# Altium PCB PCBPIC80_A3977.PcbDoc
Units mm, origin at the board's own origin, x right, y up, seen from the top; angles counter-clockwise.
Board outline 152.4 x 101.6 mm, 2 copper layers (Top Layer, Bottom Layer); 108 components, 109 nets, 496 pads, 175 vias.
Unrouted connection lines stored in the file: 83.
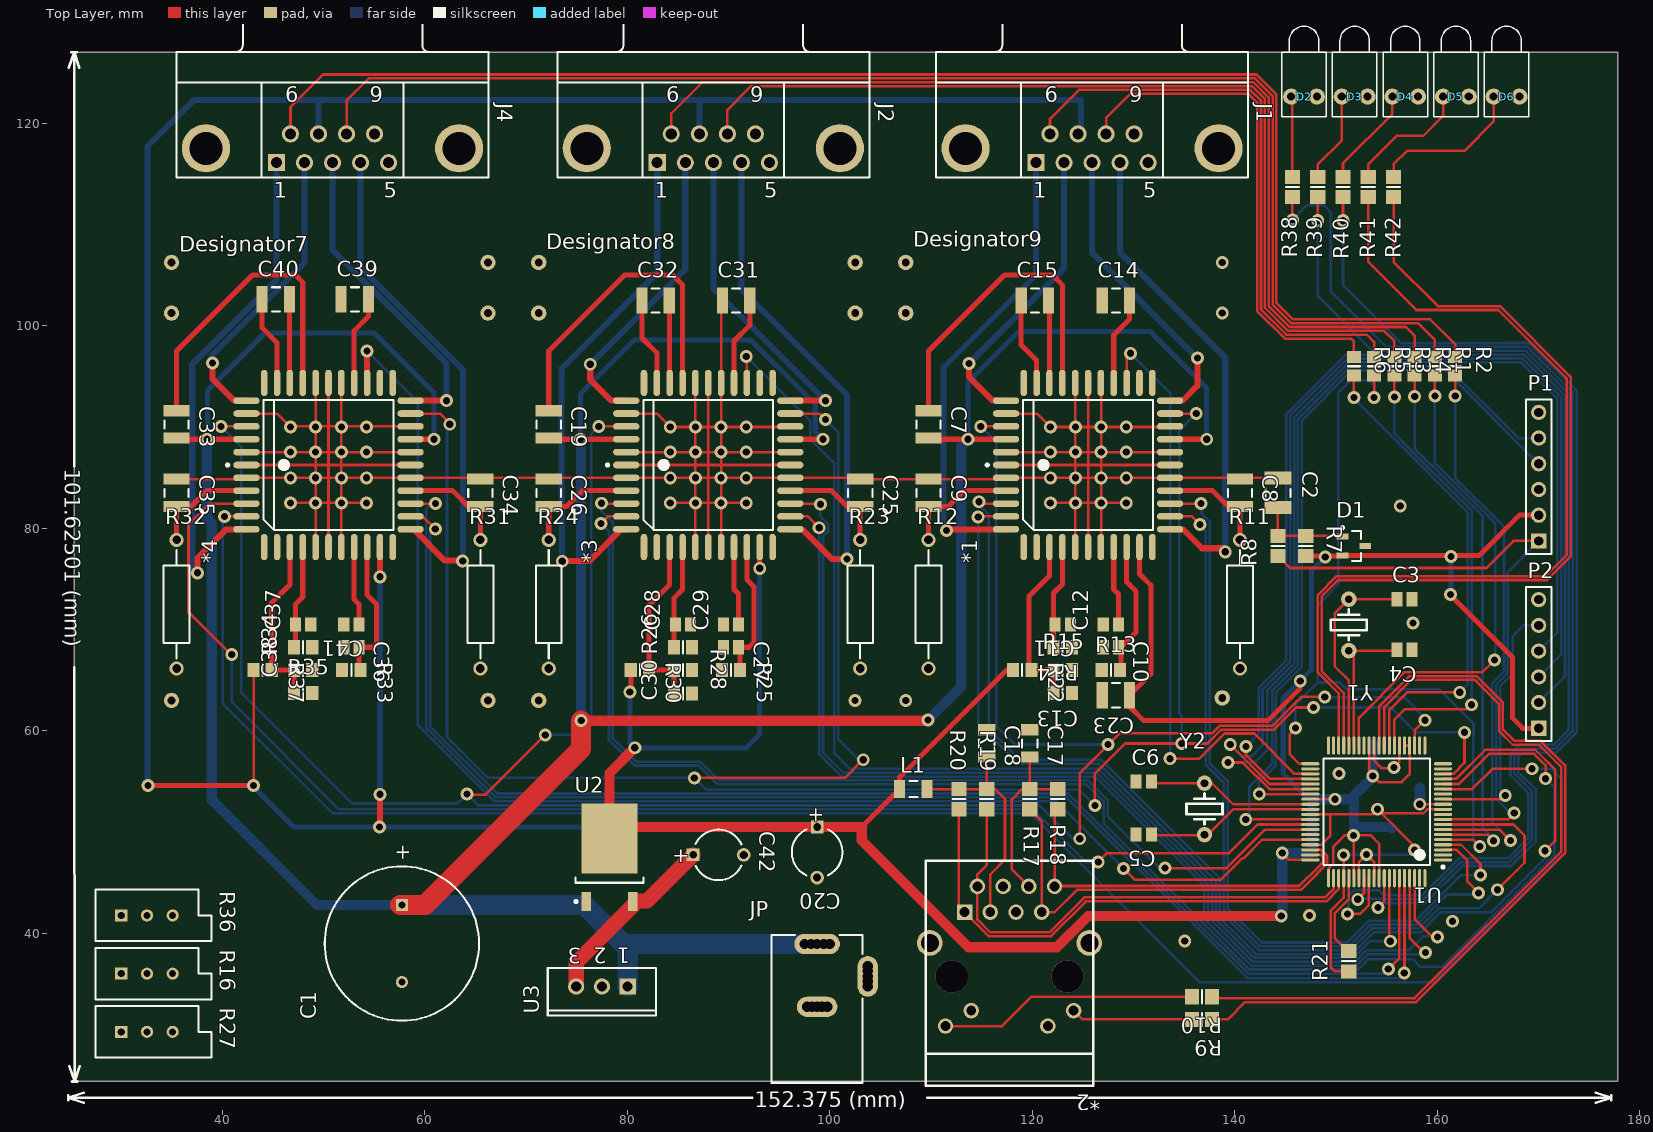
[diagram p0: Top Layer view]
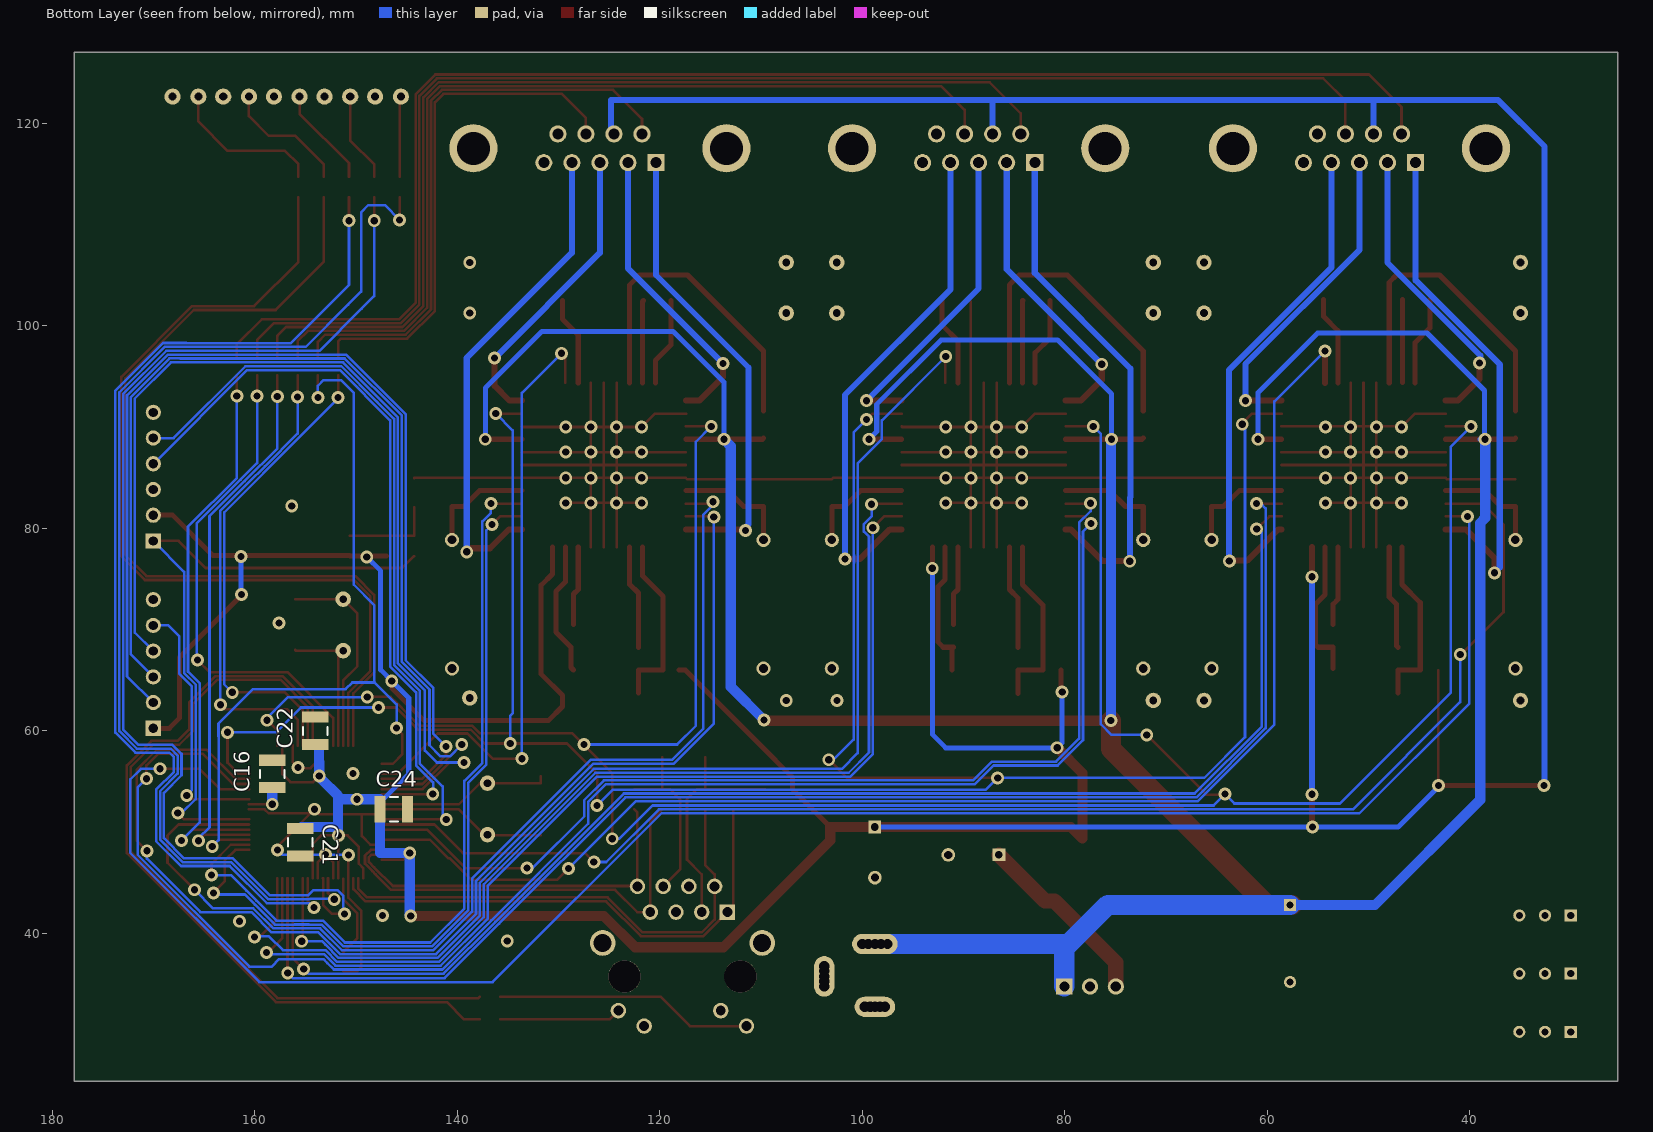
[diagram p1: Bottom Layer view, seen from below]

## Layer stack, top to bottom
Top Layer: signal copper 0.0356
Dielectric: dielectric 0.32, FR-4, Dk 4.8
Bottom Layer: signal copper 0.0356

## Board outline
25.4,25.4 177.8,25.4 177.8,127 25.4,127

## Design rules (kind name [scope] priority, off if disabled: settings)
Clearance [All] p1: gap=0.127
PolygonConnect [All] p1: connectstyle=Relief reliefconductorwidth=0.254 reliefentries=4 polygonreliefangle="90 Angle"
RoomDefinition Sheet1 [InComponentClass('Sheet1')] p1: confinementstyle=ConfineOut formatcopy=TRUE lockcomponents=FALSE outline 178.959,24.276 192.234,24.276 192.234,42.802 178.959,42.802
RoutingVias [All] p1: holewidth=0.711 width=1.27 viastyle="Through Hole" minholewidth=0.711 minwidth=1.27 maxholewidth=0.711 maxwidth=1.27
SilkscreenOverComponentPads [All] p1: minsilkscreentomaskgap=0.254
SolderMaskExpansion [All] p1: expansion=0.102
Width [All] p1: maxlimit=2.54 minlimit=0.254 preferedwidth=0.254
27 further rules are at their usual default settings.

## Components (designator, comment, footprint, x,y, rotation, side; value= is the part's Value field where it differs from the comment)
*1 "Component_1" PLCC-44AM 125.5,86.25 r90 top
*2 "LU1T516-43" EthernetCON 117.75,35.75 r270 top
*3 "Component_1" PLCC-44AM 88,86.25 r90 top
*4 "Component_1" PLCC-44AM 50.5,86.25 r90 top
C1 "Cap Pol1" RB7.6-15 57.75,39 r90 top
C2 "Cap" CAPC3225N 144.25,83.5 r270 top
C3 "Cap" CAPC2012L 156.75,73 r0 top
C4 "Cap" CAPC2012L 156.75,68 r180 top
C5 "Cap" CAPC2012L 131,49.75 r180 top
C6 "Cap" CAPC2012L 131,55 r0 top
C7 "Cap" RESC3225L 109.75,90.25 r270 top
C8 "Cap" RESC3225L 140.5,83.5 r270 top
C9 "Cap" RESC3225L 109.75,83.5 r270 top
C10 "Cap" CAPC2012L 127.75,68.25 r0 top
C11 "Cap" CAPC2012L 123,70.5 r180 top
C12 "Cap" CAPC2012L 127.75,70.5 r180 top
C13 "Cap" RESC2012N 123,63.75 r180 top
C14 "Cap" RESC3225L 128.25,102.5 r0 top
C15 "Cap" RESC3225L 120.25,102.5 r0 top
C16 "Cap" CAPC3225L 158.25,55.75 r90 bottom
C17 "Cap" CAPC3216L 119.75,58.75 r270 top
C18 "Cap" CAPC3216L 115.5,58.75 r270 top
C19 "Cap" RESC3225L 72.25,90.25 r270 top
C20 "Cap Pol1" CAPPR5-5x5 98.75,48 r270 top
C21 "Cap" CAPC3225L 155.5,49 r270 bottom
C22 "Cap" CAPC3225L 154,60 r90 bottom
C23 "Cap" CAPC3225L 128.25,63.5 r180 top
C24 "Cap" CAPC3225L 146.25,52.25 r180 bottom
C25 "Cap" RESC3225L 103,83.5 r270 top
C26 "Cap" RESC3225L 72.25,83.5 r270 top
C27 "Cap" CAPC2012L 90.25,68.25 r0 top
C28 "Cap" CAPC2012L 85.5,70.5 r180 top
C29 "Cap" CAPC2012L 90.25,70.5 r180 top
C30 "Cap" RESC2012N 85.5,63.7 r180 top
C31 "Cap" RESC3225L 90.75,102.5 r0 top
C32 "Cap" RESC3225L 82.8,102.5 r0 top
C33 "Cap" RESC3225L 35.5,90.25 r270 top
C34 "Cap" RESC3225L 65.5,83.5 r270 top
C35 "Cap" RESC3225L 35.5,83.5 r270 top
C36 "Cap" CAPC2012L 52.75,68.25 r0 top
C37 "Cap" CAPC2012L 48,70.5 r180 top
C38 "Cap" RESC2012N 48,66 r180 top
C39 "Cap" RESC3225L 53.1,102.6 r0 top
C40 "Cap" RESC3225L 45.3,102.6 r0 top
C41 "Cap" CAPC2012L 52.75,70.5 r180 top
C42 "Cap Pol1" CAPPR5-5x5 89,47.75 r0 top
D1 "Diode" SOT95P240-3N 151.75,78.25 r0 top
D2 "Power" LED-1 146.825,122.625 r90 top
D3 "Run" LED-1 151.825,122.625 r90 top
D4 "Alfa" LED-1 156.825,122.625 r90 top
D5 "Delta" LED-1 161.825,122.625 r90 top
D6 "Focus" LED-1 166.825,122.625 r90 top
Designator7 "Comment" PCBComponent_1 35.5,106 r0 top
Designator8 "Comment" PCBComponent_1 71.75,106.25 r0 top
Designator9 "Comment" PCBComponent_1 108,106.5 r0 top
J1 "D Connector 9" D-SUB-9 125.9,116.1 r0 top
J2 "D Connector 9" D-SUB-9 88.5,116.1 r0 top
J4 "D Connector 9" D-SUB-9 50.9,116.1 r0 top
JP "PWR2.5" KLD-0202 98.75,25.25 r90 top
L1 "Inductor" INDC3216AL 108.25,54.25 r0 top
P1 "Программатор" HDR1X6 170,78.75 r90 top
P2 "SPI" HDR1X6 170,60.25 r90 top
R1 "Res2" RESC2012N 159.75,96 r270 top
R2 "Res2" RESC2012N 161.75,96 r270 top
R3 "Res2" RESC2012N 155.75,96 r270 top
R4 "Res2" RESC2012N 157.75,96 r270 top
R5 "Res2" RESC2012N 153.75,96 r270 top
R6 "Res2" RESC2012N 151.75,96 r270 top
R7 "Res2" RESC2012M 147,78.25 r270 top
R8 "Res2" RESC2012M 144.25,78.25 r90 top
R9 "Res2" RESC2012M 136.75,31.5 r180 top
R10 "Res2" RESC2012M 136.75,33.75 r180 top
R11 "Res2" AXIAL-0.5 140.5,72.5 r90 top
R12 "Res2" AXIAL-0.5 109.75,72.5 r90 top
R13 "Res2" RESC2012N 127.75,66 r0 top
R14 "Res2" RESC2012N 123,68.25 r180 top
R15 "Res2" RESC2012N 123,66 r0 top
R16 "RPot" VR5 32.575,36.025 r0 top
R17 "Res2" RESC2012M 119.75,53.25 r270 top
R18 "Res2" RESC2012M 122.5,53.25 r270 top
R19 "Res2" RESC2012M 115.5,53.25 r270 top
R20 "Res2" RESC2012M 112.75,53.25 r270 top
R21 "Res2" RESC2012M 151.25,37.25 r90 top
R22 "Res2" RESC2012N 119,66 r0 top
R23 "Res2" AXIAL-0.5 103,72.5 r90 top
R24 "Res2" AXIAL-0.5 72.25,72.5 r90 top
R25 "Res2" RESC2012N 90.25,66 r0 top
R26 "Res2" RESC2012N 85.5,68.25 r180 top
R27 "RPot" VR5 32.575,30.275 r0 top
R28 "Res2" RESC2012N 85.5,66 r0 top
R30 "Res2" RESC2012N 81.25,66 r0 top
R31 "Res2" AXIAL-0.5 65.5,72.5 r90 top
R32 "Res2" AXIAL-0.5 35.5,72.5 r90 top
R33 "Res2" RESC2012N 52.75,66 r0 top
R34 "Res2" RESC2012N 48,68.25 r180 top
R35 "Res2" RESC2012N 48,63.75 r0 top
R36 "RPot" VR5 32.575,41.775 r0 top
R37 "Res2" RESC2012N 44,66 r0 top
R38 "Res2" RESC2012M 145.675,113.7 r90 top
R39 "Res2" RESC2012M 148.175,113.7 r90 top
R40 "Res2" RESC2012M 150.675,113.7 r90 top
R41 "Res2" RESC2012M 153.175,113.7 r90 top
R42 "Res2" RESC2012M 155.675,113.7 r90 top
U1 "PIC18F87J60-I/PT" TQFP-PT80_N 154,52 r180 top
U2 "LM1117DT-3.3" TD03B_N 78.25,47.5 r90 top
U3 "µA78M05CKC" KC03 77.5,34.75 r180 top
Y1 "XTAL" Quartz 151.25,73 r270 top
Y2 "XTAL" Quartz 137,49.75 r90 top

## Footprints (in the part's own frame and the unit in brackets; to place one, negate y for a bottom-side part, rotate by r counter-clockwise, add the part's x,y. Pads: shape width x height; smd on the part's side, far side on the other; paste and mask are expansions set on the pad)
AXIAL-0.5 [mm] "Axial Device, Thru-Hole; 2 Leads; 0.5 in Pin Spacing"
  round 1.4 hole 0.85: 1(-6.35,0) 2(6.35,0)
  silkscreen extent -5.33,-1.27 5.33,1.27
CAPC2012L [mm] "Chip Capacitor, Body 2.0x1.3mm, IPC High Density"
  rect 1.1x1.4 smd: 1(-0.75,0) 2(0.75,0)
  body extent -1.1,-0.72 1.1,0.72, height 1.4
CAPC3216L [mm] "Chip Capacitor, Body 3.2x1.6mm, IPC High Density"
  rect 1.1x1.7 smd: 1(-1.35,0) 2(1.35,0)
  silkscreen extent -0.4,-0.75 0.4,0.75, body extent -1.7,-0.9 1.7,0.9, height 1.3
CAPC3225L [mm] "Chip Capacitor, Body 3.2x2.5mm, IPC High Density"
  rect 1.1x2.6 smd: 1(-1.35,0) 2(1.35,0)
  silkscreen extent -0.4,-1.2 0.4,1.2, body extent -1.7,-1.35 1.7,1.35, height 1.5
CAPC3225N [mm] "Chip Capacitor, Body 3.2x2.5mm, IPC Medium Density"
  rect 1.3x2.7 smd: 1(-1.45,0) 2(1.45,0)
  silkscreen extent -0.4,-1.25 0.4,1.25, body extent -1.7,-1.35 1.7,1.35, height 1.5
CAPPR5-5x5 [mm] "Capacitor, Electrolytic, Radial; Body 5 x 5 mm (Dia.xH typ); Pin Spacing 5 mm (typ)"
  rect 1.25x1.25 hole 0.75: 1(-2.5,0)
  round 1.35 hole 0.8: 2(2.5,0)
  silkscreen extent -2.26,-2.5 2.27,2.5
D-SUB-9 [mm] "Connector"
  rect 1.69x1.69 hole 1.09: 1(-5.54,0)
  round 1.69 hole 1.09: 2(-2.77,0) 3(0,0) 4(2.77,0) 5(5.54,0) 6(-4.155,2.84) 7(-1.385,2.84) 8(1.385,2.84) 9(4.155,2.84)
  round 4.76 hole 3.26: 10(-12.495,1.42) 11(12.495,1.42)
  silkscreen extent -15.4,-1.48 15.4,16.92, body extent -15.49,-1.52 15.49,17.02, height 6.35
EthernetCON [mil] "Ethernet connector w/two LEDs"
  rect 60x60 hole 38: 1(-250,-175)
  round 60 hole 38: 2(-350,-125) 3(-250,-75) 4(-350,-25) 5(-250,25) 6(-350,75) 7(-250,125) 8(-350,175) 9(193,-249) 10(133,-149) 11(193,149) 12(133,249)
  round 100 hole 70: 13(-130,-310) 14(-130,310)
  round 125 hole 125 unplated: 15(0,-225) 16(0,225)
  silkscreen extent -450,-325 425,325, body extent -450,-325 425,325, height 550
HDR1X6 [mm] "Connector; Header; 6 Position"
  rect 1.5x1.5 hole 0.9: 1(0,0)
  round 1.5 hole 0.9: 2(2.54,0) 3(5.08,0) 4(7.62,0) 5(10.16,0) 6(12.7,0)
  silkscreen extent -1.27,-1.27 13.97,1.27
INDC3216AL [mm] "Chip Inductor, Body 3.2x1.6mm, IPC High Density"
  rect 1.1x1.8 smd: 1(-1.35,0) 2(1.35,0)
  silkscreen extent -0.4,-0.8 0.4,0.8, body extent -1.7,-0.9 1.7,0.9, height 0.55
KC03 [mm] "TO, Thru-Hole, Vertical, Heatsink Mounted; 3 In-Line Leads; Pitch 2.54 mm"
  rect 1.6x1.6 hole 1: 1(-2.54,0)
  round 1.6 hole 1: 2(0,0) 3(2.54,0)
  silkscreen extent -5.35,-1.85 5.35,2.85
KLD-0202 [mm] "DC Power Jack, 2.5mm, KLD Series, PCB Mount"
  oval 2x4.5 hole 1: 1(13.7,0)
  round 1.5 hole 1: 1A(13.7,-1.25) 1B(13.7,1.25) 2A(7.5,-1) 2B(7.5,1) 3A(9.5,-5) 3B(11.5,-5)
  oval 2x4 hole 1: 2(7.5,0)
  oval 4x2 hole 1: 3(10.5,-5)
  silkscreen extent 0,-4.5 14.6,4.5
LED-1 [mm] "Typical RED GaAs LED; 2 Leads"
  round 1.6 hole 0.8: 1(0,1.27) 2(0,-1.27)
  silkscreen extent -2,-2.2 6.95,2.2
PCBComponent_1 [mm]
  body extent 0,-43.18 30.48,0, height 25
PLCC-44AM [mm] "Leaded Chip Carrier, 44-Leads, Body 16.6x16.6mm, Pitch 1.27mm, IPC Low Density"
  oval 0.65x2.6 smd: 1(0,8.1) 2(-1.27,8.1) 3(-2.54,8.1) 4(-3.81,8.1) 5(-5.08,8.1) 6(-6.35,8.1) 18(-6.35,-8.1) 19(-5.08,-8.1) 20(-3.81,-8.1) 21(-2.54,-8.1) 22(-1.27,-8.1) 23(0,-8.1) 24(1.27,-8.1) 25(2.54,-8.1) 26(3.81,-8.1) 27(5.08,-8.1) 28(6.35,-8.1) 40(6.35,8.1) 41(5.08,8.1) 42(3.81,8.1) 43(2.54,8.1) 44(1.27,8.1)
  oval 2.6x0.65 smd: 7(-8.1,6.35) 8(-8.1,5.08) 9(-8.1,3.81) 10(-8.1,2.54) 11(-8.1,1.27) 12(-8.1,0) 13(-8.1,-1.27) 14(-8.1,-2.54) 15(-8.1,-3.81) 16(-8.1,-5.08) 17(-8.1,-6.35) 29(8.1,-6.35) 30(8.1,-5.08) 31(8.1,-3.81) 32(8.1,-2.54) 33(8.1,-1.27) 34(8.1,0) 35(8.1,1.27) 36(8.1,2.54) 37(8.1,3.81) 38(8.1,5.08) 39(8.1,6.35)
  silkscreen extent -6.4,-6.4 6.4,10.07, body extent -8.33,-8.33 8.33,8.33, height 4.57
Quartz [mil]
  round 60 hole 30: 1(0,0) 2(200,0)
  silkscreen extent 40,-70 160,70, body extent -100,-100 300,100, height 90
RB7.6-15 [mm] "Polarized Capacitor (Radial); 2 Leads"
  rect 1.2x1.2 hole 0.7: 1(3.81,0)
  round 1.2 hole 0.7: 2(-3.81,0)
  silkscreen extent -7.62,-7.62 7.62,7.62
RESC2012M [mm] "Chip Resistor, Body 2.0x1.2mm, IPC Low Density"
  rect 1.4x1.5 smd: 1(-1,0) 2(1,0)
  silkscreen extent 0,-0.65 0,0.65, body extent -1.07,-0.7 1.07,0.7, height 0.7
RESC2012N [mm] "Chip Resistor, Body 2.0x1.2mm, IPC Medium Density"
  rect 1.2x1.4 smd: 1(-0.9,0) 2(0.9,0)
  silkscreen extent 0,-0.6 0,0.6, body extent -1.07,-0.7 1.07,0.7, height 0.7
RESC3225L [mm] "Chip Resistor, Body 3.2x2.5mm, IPC High Density"
  rect 1.1x2.6 smd: 1(-1.35,0) 2(1.35,0)
  silkscreen extent -0.4,-1.2 0.4,1.2, body extent -1.68,-1.32 1.68,1.32, height 0.9
SOT95P240-3N [mm] "SOT23, 3-Leads, Body 2.9x1.3mm, Pitch 0.95mm, Lead Span 2.4mm, IPC Medium Density"
  rect 1.15x0.6 smd: 1(-1.125,0.95) 2(-1.125,-0.95) 3(1.125,0)
  silkscreen extent -1.25,-1.5 0.7,1.92, body extent -0.7,-1.5 0.7,1.5, height 1.14
TD03B_N [mm] "D-PAK, 4-Leads, Body 6.1x6.6mm, Pitch 2.29mm, Lead Span 9.7mm, IPC Medium Density"
  rect 1.9x0.95 smd: 1(-4.35,2.28) 3(-4.35,-2.28)
  rect 6.9x5.5 smd: 4(1.85,0)
  silkscreen extent -4.47,-3.35 -2,3.43, body extent -2.5,-3.35 3.7,3.35, height 2.38
TQFP-PT80_N [mm] "Thin QFP, 80-Leads, Body 12x12mm, Pitch 0.5mm, IPC Medium Density"
  oval 1.8x0.3 smd: 1(-6.55,4.75) 2(-6.55,4.25) 3(-6.55,3.75) 4(-6.55,3.25) 5(-6.55,2.75) 6(-6.55,2.25) 7(-6.55,1.75) 8(-6.55,1.25) 9(-6.55,0.75) 10(-6.55,0.25) 11(-6.55,-0.25) 12(-6.55,-0.75) 13(-6.55,-1.25) 14(-6.55,-1.75) 15(-6.55,-2.25) 16(-6.55,-2.75) 17(-6.55,-3.25) 18(-6.55,-3.75) 19(-6.55,-4.25) 20(-6.55,-4.75) 41(6.55,-4.75) 42(6.55,-4.25) 43(6.55,-3.75) 44(6.55,-3.25) 45(6.55,-2.75) 46(6.55,-2.25) 47(6.55,-1.75) 48(6.55,-1.25) 49(6.55,-0.75) 50(6.55,-0.25) 51(6.55,0.25) 52(6.55,0.75) 53(6.55,1.25) 54(6.55,1.75) 55(6.55,2.25) 56(6.55,2.75) 57(6.55,3.25) 58(6.55,3.75) 59(6.55,4.25) 60(6.55,4.75)
  oval 0.3x1.8 smd: 21(-4.75,-6.55) 22(-4.25,-6.55) 23(-3.75,-6.55) 24(-3.25,-6.55) 25(-2.75,-6.55) 26(-2.25,-6.55) 27(-1.75,-6.55) 28(-1.25,-6.55) 29(-0.75,-6.55) 30(-0.25,-6.55) 31(0.25,-6.55) 32(0.75,-6.55) 33(1.25,-6.55) 34(1.75,-6.55) 35(2.25,-6.55) 36(2.75,-6.55) 37(3.25,-6.55) 38(3.75,-6.55) 39(4.25,-6.55) 40(4.75,-6.55) 61(4.75,6.55) 62(4.25,6.55) 63(3.75,6.55) 64(3.25,6.55) 65(2.75,6.55) 66(2.25,6.55) 67(1.75,6.55) 68(1.25,6.55) 69(0.75,6.55) 70(0.25,6.55) 71(-0.25,6.55) 72(-0.75,6.55) 73(-1.25,6.55) 74(-1.75,6.55) 75(-2.25,6.55) 76(-2.75,6.55) 77(-3.25,6.55) 78(-3.75,6.55) 79(-4.25,6.55) 80(-4.75,6.55)
  silkscreen extent -6.68,-5.25 5.25,5.57, body extent -6,-6 6,6, height 1.2
VR5 [mm] "Variable Resistor, Thru-Hole; 3 Leads"
  rect 1.2x1.2 hole 0.7: 1(-2.54,0)
  round 1.2 hole 0.7: 2(0,0) 3(2.54,0)
  silkscreen extent -5.08,-2.54 6.35,2.54

## Part data
C1 C20 C42: "Polarized Capacitor (Radial)"
C2 C3 C4 C5 C6 C7 C8 C9 C10 C11 C12 C13 C14 C15 C16 C17 C18 C19 C21 C22 C23 C24 C25 C26 C27 C28 C29 C30 C31 C32 C33 C34 C35 C36 C37 C38 C39 C40 C41: "Capacitor"
D1: "Default Diode"
D2 D3 D4 D5 D6: library part LED1, "Typical RED GaAs LED"
J1 J2 J4: "Receptacle Assembly, 9 Position, Right Angle"
JP: "Low Voltage Power Supply Connector"
P1 P2: library part "Header 6", "Header, 6-Pin"
R1 R2 R3 R4 R5 R6 R7 R8 R9 R10 R11 R12 R13 R14 R15 R17 R18 R19 R20 R21 R22 R23 R24 R25 R26 R28 R30 R31 R32 R33 R34 R35 R37 R38 R39 R40 R41 R42: "Resistor"
R16 R27 R36: "Potentiometer"
U1: "High Performance, 1-Mbit Flash Microcontroller with Ethernet, 128K Flash, 80-Pin TQFP, Industrial Temperature Range"
U2: "800mA Low-Dropout Linear Regulator"
U3: "Positive-Voltage Regulator"
Y1 Y2: "Crystal Oscillator"

## Free pads (board coordinates)
  round 1.524 hole 1: 0(98.15,38.95) 0(98.225,32.75) 0(99.2,32.75) 0(99.4,38.95) 0(103.75,35.275) 0(103.75,36.275)
  round 1.524 hole 0.762: 1(66.25,106.25) 2(71.25,106.25) 3(71.25,101.25) 4(66.25,101.25) 5(35,106.25) 6(35,101.25) 7(102.5,106.25) 8(102.5,101.25) 9(107.5,106.25) 10(107.5,101.25) 11(138.75,63.25) 12(71.25,63) 13(66.25,63) 14(35,63)

## Via types
v1: diameter 1.27, hole 0.711, Top Layer to Bottom Layer, 175 vias

## Nets (pads, with @x,y where several pads share a name; then routed paths per layer and width w, separated by ;. In a path a pad name is that pad's centre, name@x,y a point inside that pad or via, vN(x,y) a via of type N, cw(c..) or ccw(c..) an arc to the next point about the centre after c; other vN are vias at no path point)
+5: C42.1 U2.3 U3.3 | length 18.3
  Top Layer w1.5: U3.3 74.96,37.135 81.025,43.2 81.95,43.2 C42.1
+30: *1.25 *1.43 *3.25 *3.43 *4.25 *4.43 C1.1 C7.2 C19.2 C33.2 JP.1 JP.1A JP.1B pad.0@98.15,38.95 pad.0@99.4,38.95 U3.1 | length 366.2
  Top Layer w0.5: C33.2 35.61,88.79 v1(38.5,88.79) *4.43 ; *4.25 v1(60.915,88.79) ; C19.2 72.36,88.79 v1(75.375,88.79) *3.43 ; *3.25 v1(99.325,88.79) ; C7.2 109.86,88.79 v1(113.65,88.79) *1.43 ; *1.25 v1(137.215,88.79)
  Top Layer w1: v1@75.425,61 109.625,61 v1(109.7,61.075)
  Top Layer w2: C1.1@57.59,42.81 60.035,42.81 75.425,58.2 v1@75.425,61
  Bottom Layer w0.5: v1@38.975,88.79 38.737,89.028 38.55,89.215 38.55,93.6 44.225,99.275 55.025,99.275 60.915,93.385 v1(60.915,88.79) ; v1(75.375,88.79) 75.375,93.275 80.7,98.6 92.2,98.6 98.563,92.237 98.563,89.552 v1(99.325,88.79) ; v1(113.65,88.79) 113.65,94.425 118.675,99.45 131.625,99.45 137.215,93.86 v1(137.215,88.79)
  Bottom Layer w1: v1@38.475,88.79 38.475,81.025 38.975,80.525 38.975,53.2 49.365,42.81 C1.1 ; v1(75.45,61.025) v1@75.45,88.79 ; v1(109.7,61.075) 112.975,64.35 112.975,88.115 v1(113.65,88.79)
  Bottom Layer w2: C1.1 75.74,42.81 80.04,38.51 ; U3.1 80.04,38.95 JP.1B
DIRALFA: *1.5 U1.17 | length 116.8
  Top Layer w0.254: v1(114.65,81.125) 114.695,81.17 *1.5 ; U1.17 161.85,55.25 164.731,58.131 169.658,58.131 171.65,56.139 171.65,54.625 171.65,49.175 v1(170.625,48.15)
  Bottom Layer w0.254: v1(114.65,81.125) 114.65,60.711 118.592,56.769 126.521,56.769 138.132,45.158 138.132,41.912 142.088,37.956 151.548,37.956 153.698,40.107 154.975,40.107 154.982,40.114 155.718,40.114 155.725,40.107 158.307,40.107 160.289,42.089 165.336,42.089 170.625,47.378 v1(170.625,48.15) v1@170.525,48.25
DIRDELTA: *3.5 U1.16 | length 154.8
  Top Layer w0.254: v1(77.4,80.475) 78.095,81.17 *3.5 ; U1.16 162.15,54.75 165.15,57.75 169.5,57.75 170.675,56.575 v1(170.675,55.275)
  Bottom Layer w0.254: v1(77.4,80.475) 78.195,79.68 78.195,59.084 80.703,56.575 87.036,56.575 88.892,54.719 125.338,54.719 127.064,52.993 127.064,50.825 136.608,41.281 141.457,36.432 152.179,36.432 152.822,37.075 153.197,37.45 157.575,37.45 158.3,36.725 160.511,36.725 171.55,47.764 171.55,54.4 v1(170.675,55.275)
DIRFOCUS: *4.5 U1.15 | length 189.8
  Top Layer w0.254: v1(40.225,81.17) *4.5 ; U1.15 163.425,54.25 165.425,56.25 v1(169.325,56.25)
  Bottom Layer w0.254: v1@40.05,81.17 40.05,62.718 50.905,51.863 119.812,51.863 136.489,35.186 159.511,35.186 172.275,47.95 172.275,55.2 171.225,56.25 v1(169.325,56.25)
GND: *1.1 *1.2 *1.11 *1.12 *1.13 *1.22 *1.23 *1.24 *1.26 *1.33 *1.34 *1.35 *1.41 *1.44 *2.10 *2.11 *2.13 *2.14 *3.1 *3.2 *3.11 *3.12 *3.13 *3.22 *3.23 *3.24 *3.26 *3.33 *3.34 *3.35 *3.41 *3.44 *4.1 *4.2 *4.11 *4.12 *4.13 *4.22 *4.23 *4.24 *4.26 *4.33 *4.34 *4.35 *4.41 *4.44 C1.2 C2.1 C3.2 C4.1 C5.2 C6.1 C8.1 C9.1 C10.1 C11.1 C12.2 C13.1 C14.1 C16.2 C17.1 C18.1 C20.2 C21.2 C22.2 C23.2 C24.2 C25.1 C26.1 C27.1 C28.1 C29.2 C30.1 C31.1 C34.1 C35.1 C36.1 C37.1 C38.1 C39.1 C41.2 C42.2 D2.2 D3.2 D4.2 D5.2 D6.2 J1.5 J1.10 J1.11 J2.5 J2.10 J2.11 J4.5 J4.10 J4.11 JP.2 JP.2A JP.2B JP.3 JP.3A JP.3B P1.3 P2.6 pad.0@98.225,32.75 pad.0@99.2,32.75 pad.0@103.75,35.275 pad.0@103.75,36.275 R11.1 R12.1 R13.1 R14.1 R15.2 R16.1 R21.1 R23.1 R24.1 R25.1 R26.1 R27.1 R28.2 R31.1 R32.1 R33.1 R34.1 R35.2 R36.1 U1.11 U1.26 U1.31 U1.51 U1.57 U1.64 U1.67 U1.70 U2.1 U3.2 | length 492.5
  Top Layer w0.254: C35.1 *4.2@42.27,84.85 ; *4.1 49.23,86.25 ; *4.44 v1(46.75,87.52) v1(49.23,87.52) ; *4.41 45.42,91.33 v1(46.75,90) 46.81,90.06 v1@49.23,90.06 ; v1(46.75,82.5) v1(49.23,82.5) ; v1(46.75,84.98) *4.2 v1(49.23,84.98) ; *4.11 v1(49.23,82.5) ; *4.35 v1@49.23,90.06 ; *4.12 50.5,82.5 ; *4.34 50.5,90.06 ; *4.13 v1(51.77,82.5) ; *4.33 v1@51.77,90.06 ; v1(54.25,82.5) v1(51.77,82.5) ; *4.23 51.77,86.25 ; *4.24 v1(54.25,87.52) v1(51.77,87.52) ; *4.26 v1@51.77,90.06 ; *3.1 86.73,86.25 ; *3.44 v1(84.25,87.52) v1(86.73,87.52) ; *3.41 82.92,91.33 v1(84.25,90) v1(86.73,90) ; v1(84.25,82.5) v1(86.73,82.5) ; *3.11 v1(86.73,82.5) ; *3.35 v1(86.73,90) ; *3.12 88,82.5 ; *3.34 88,90 ; *3.13 v1(89.27,82.5) ; C31.1 89.27,102.37 *3.33 v1(89.27,90) ; v1(91.75,82.5) v1(89.27,82.5) ; *3.23 89.27,86.25 ; *3.24 v1(91.75,87.52) v1(89.27,87.52) ; *3.26 96.04,90 v1(91.75,90) v1(89.27,90) ; *1.41 120.445,91.33 v1(121.775,90) v1(124.255,90) ; *1.1@117.425,86.25 124.255,86.25 ; *1.44@117.425,87.52 v1(121.775,87.52) v1(124.255,87.52) ; v1(121.775,82.5) v1(124.255,82.5) ; *1.11@124.255,78.15 v1(124.255,82.5) ; *1.35@124.255,94.35 v1(124.255,90) ; *1.12@125.525,78.15 125.525,82.5 ; *1.34@125.525,94.35 125.525,90 ; *1.13@126.795,78.15 v1(126.795,82.5) ; *1.33@126.795,94.35 v1(126.795,90) ; v1(129.275,82.5) v1(126.795,82.5) ; *1.26 133.54,90 v1(129.275,90) v1(126.795,90) ; *1.22@133.625,84.98 *1.22 ; *1.23@133.625,86.25 *1.23 126.795,86.25 ; *1.24@133.625,87.52 *1.24 v1(129.275,87.52) v1(126.795,87.52) ; C2.1 144.22,84.98 *1.22 ; U1.57 148.55,48.75 149.4,49.6 149.4,51.75 ; U1.51 149.4,51.75 ; v1(150.725,47.75) 150.75,47.725 U1.64 150.75,43.525 149.475,42.25 149.475,42.14 149.467,42.133 149.467,40.844 149.467,39.394 149.475,39.386 149.475,36.65 149.875,36.25 R21.1 ; U1.67 152.25,47.025 v1(153,47.775) 153.75,47.025 U1.70 ; U1.31 153.75,57.05 154.475,56.325 155.675,56.325 v1(155.725,56.375) 156.25,56.9 U1.26 ; v1(157.725,48.225) 157.725,48.6 v1@154.464,51.861 ; U1.11 159.007,52.25 158.618,51.861 v1@154.464,51.861 ; v1(49.23,82.5) v1(49.23,84.98) ; v1(49.23,82.5) 50.5,82.5 ; v1(49.23,84.98) 49.23,86.25 ; v1(49.23,84.98) 50.5,84.98 ; 49.23,86.25 50.5,86.25 ; 49.23,86.25 v1(49.23,87.52) ; v1(49.23,87.52) v1(49.23,90) v1@49.23,90.06 ; v1(49.23,87.52) 50.5,87.52 ; v1@49.23,90.06 50.5,90.06 ; 50.5,82.5 v1(51.77,82.5) ; 50.5,82.5 50.5,84.98 ; 50.5,84.98 v1(51.77,84.98) ; 50.5,84.98 50.5,86.25 ; 50.5,86.25 50.5,87.52 ; 50.5,86.25 51.77,86.25 ; 50.5,87.52 v1(51.77,87.52) ; 50.5,87.52 50.5,90.06 ; 50.5,90.06 v1@51.77,90.06 ; v1(51.77,82.5) v1(51.77,84.98) ; v1(51.77,84.98) v1(54.25,84.98) *4.22 *3.2 v1(84.25,84.98) v1(86.73,84.98) ; v1(51.77,84.98) 51.77,86.25 ; 51.77,86.25 v1(51.77,87.52) ; v1(51.77,87.52) v1(51.77,90) v1@51.77,90.06 ; v1(86.73,82.5) 88,82.5 ; v1(86.73,82.5) v1(86.73,84.98) ; v1(86.73,84.98) 88,84.98 ; v1(86.73,84.98) 86.73,86.25 ; 86.73,86.25 v1(86.73,87.52) ; 86.73,86.25 88,86.25 ; v1(86.73,87.52) v1(86.73,90) ; v1(86.73,87.52) 88,87.52 ; v1(86.73,90) 88,90 ; 88,82.5 88,84.98 ; 88,82.5 v1(89.27,82.5) ; 88,84.98 88,86.25 ; 88,84.98 v1(89.27,84.98) ; 88,86.25 88,87.52 ; 88,86.25 89.27,86.25 ; 88,87.52 88,90 ; 88,87.52 v1(89.27,87.52) ; 88,90 v1(89.27,90) ; v1(89.27,82.5) v1(89.27,84.98) ; v1(89.27,84.98) v1(91.75,84.98) *3.22 102.87,84.98 C25.1 C9.1 117.295,84.85 117.425,84.98 v1(121.775,84.98) v1(124.255,84.98) ; v1(89.27,84.98) 89.27,86.25 ; 89.27,86.25 v1(89.27,87.52) ; v1(89.27,87.52) v1(89.27,90) ; v1(124.255,82.5) 125.525,82.5 ; v1(124.255,82.5) v1(124.255,84.98) ; v1(124.255,84.98) 124.255,86.25 ; v1(124.255,84.98) 125.525,84.98 ; 124.255,86.25 125.525,86.25 ; 124.255,86.25 v1(124.255,87.52) ; v1(124.255,87.52) v1(124.255,90) ; v1(124.255,87.52) 125.525,87.52 ; v1(124.255,90) 125.525,90 ; 125.525,82.5 125.525,84.98 ; 125.525,82.5 v1(126.795,82.5) ; 125.525,84.98 v1(126.795,84.98) ; 125.525,84.98 125.525,86.25 ; 125.525,86.25 126.795,86.25 ; 125.525,86.25 125.525,87.52 ; 125.525,87.52 125.525,90 ; 125.525,87.52 v1(126.795,87.52) ; 125.525,90 v1(126.795,90) ; v1(126.795,82.5) v1(126.795,84.98) ; v1(126.795,84.98) v1(129.275,84.98) *1.22 ; v1(126.795,84.98) 126.795,86.25 ; 126.795,86.25 v1(126.795,87.52) ; v1(126.795,87.52) v1(126.795,90) ; 149.4,51.75 153.575,51.75 v1(154.075,52.25) v1@154.464,51.861
  Bottom Layer w0.254: v1(150.725,47.75) 157.25,47.75 v1(157.725,48.225)
  other v1: 135.05,39.25 161.5,41.2 147.375,41.775 150.275,55.775 157.575,70.65 156.325,82.2 54.25,90
HOME_ALFA: *1.4 U1.8 | length 104.2
  Top Layer w0.254: v1(114.725,82.625) 114.91,82.44 *1.4 ; U1.8 167.5,50.75 168.6,49.65 168.6,46.975 v1(165.936,44.311)
  Bottom Layer w0.254: v1(114.725,82.625) 114.725,82.307 115.675,81.357 115.675,60.225 118.75,57.15 126.775,57.15 138.513,45.412 138.513,42.159 142.335,38.337 151.39,38.337 153.541,40.488 154.817,40.488 154.824,40.495 155.876,40.495 155.883,40.488 158.149,40.488 160.131,42.47 163.222,42.47 164.095,42.47 v1(165.936,44.311)
HOME_DELTA: *3.4 U1.54 | length 102.8
  Top Layer w0.254: v1(77.45,82.475) 77.485,82.44 *3.4 ; v1(133.1,46.45) 139.175,46.45 142.975,50.25 U1.54
  Bottom Layer w0.254: v1(77.45,82.475) 77.45,81.682 78.576,80.556 78.576,59.242 80.861,56.956 87.194,56.956 89.05,55.1 125.496,55.1 127.445,53.151 127.445,51.555 132.55,46.45 v1(133.1,46.45)
HOME_FOCUS: *4.4 U1.53 | length 140.5
  Top Layer w0.254: v1@40.9,67.5 36.675,71.725 36.675,80.375 38.74,82.44 *4.4 ; v1(126.5,47.05) 127.375,47.925 139.425,47.925 142.25,50.75 U1.53
  Bottom Layer w0.254: v1(40.95,67.55) 40.95,62.85 51.556,52.244 120.081,52.244 125.275,47.05 v1(126.5,47.05)
MS1_ALFA: *1.20 U1.4 | length 78.8
  Top Layer w0.254: *1.20 v1(136.665,82.44) ; U1.4 162.35,48.75 164.25,46.85 v1(164.25,45.75)
  Bottom Layer w0.254: v1(136.665,82.44) 136.665,81.517 137.5,80.682 137.5,56.825 139.275,55.05 139.275,42.475 142.651,39.099 151.074,39.099 153.225,41.25 154.501,41.25 154.508,41.257 156.192,41.257 156.199,41.25 157.834,41.25 159.816,43.232 160.802,44.218 162.334,45.75 v1(164.25,45.75)
MS1_DELTA: *3.20 U1.78 | length 107.3
  Top Layer w0.254: *3.20 99.01,82.44 v1(99.075,82.375) ; U1.78 157.75,41.425 159.525,39.65 v1(160,39.65)
  Bottom Layer w0.254: v1(99.075,82.375) 99.075,81.182 99.839,80.418 99.839,79.682 99.331,79.174 99.331,57.858 101.327,55.862 126.35,55.862 137.37,44.842 137.37,41.596 141.772,37.194 151.863,37.194 153.005,38.336 153.607,38.336 154.982,38.336 157.211,38.336 158.589,39.714 159.936,39.714 v1(160,39.65)
MS1_FOCUS: *4.20 U1.76 | length 142.1
  Top Layer w0.254: *4.20 v1(61.075,82.44) ; v1@156.75,36.075 U1.76
  Bottom Layer w0.254: v1(61.075,82.44) 60.626,82.44 60.161,81.975 60.161,60.28 67.009,53.432 123.379,53.432 135.846,40.965 141.225,35.586 156.236,35.586 156.687,36.037 156.687,36.313 156.725,36.275 v1(156.725,36.075)
MS2_ALFA: *1.19 U1.3 | length 77.7
  Top Layer w0.254: *1.19 135.755,81.17 v1(136.55,80.375) ; U1.3 161.9,48.25 162.925,47.225 162.925,45.169 164.05,44.044 v1(164.05,43.975)
  Bottom Layer w0.254: v1(136.55,80.375) 137.119,79.806 137.119,56.667 138.894,54.892 138.894,42.317 142.493,38.718 151.232,38.718 153.383,40.869 154.659,40.869 154.666,40.876 156.034,40.876 156.041,40.869 157.991,40.869 159.973,42.851 160.959,43.837 162.876,43.837 164.05,43.837 v1(164.05,43.975)
MS2_DELTA: *3.19 U1.77 | length 104.7
  Top Layer w0.254: *3.19 97.83,81.17 v1(98.95,80.05) ; U1.77 157.25,39.525 v1@158.75,38.025
  Bottom Layer w0.254: v1(98.95,80.05) 98.95,57.7 101.169,55.481 126.193,55.481 136.989,44.685 136.989,41.775 136.989,41.439 141.615,36.813 152.021,36.813 153.163,37.955 153.449,37.955 153.765,37.955 158.68,37.955 v1(158.825,38.1)
MS2_FOCUS: *4.19 U1.75 | length 137.1
  Top Layer w0.254: *4.19 59.805,81.17 v1(61.05,79.925) ; v1(155.15,36.475) 156.25,37.575 156.25,38.775 U1.75
  Bottom Layer w0.254: v1(61.05,79.925) 60.9,79.925 60.542,79.567 60.542,60.438 67.167,53.813 123.537,53.813 136.227,41.123 141.325,36.025 154.7,36.025 v1(155.15,36.475)
Net*1_3: *1.3 C9.2 R12.2 | length 11.6
  Top Layer w0.5: R12.2 C9.2 111.7,82.15 113.26,83.71 *1.3
Net*1_6: *1.6 J1.1 | length 46.6
  Top Layer w0.6: v1(111.525,79.775) 111.65,79.9 *1.6
  Bottom Layer w0.6: v1(111.525,79.775) 111.85,79.775 111.225,80.4 111.225,82.4 111.225,95.875 120.36,105.01 J1.1
Net*1_9: *1.9 C13.2 R15.1 R22.2 | length 17.7
  Top Layer w0.5: *1.9 121.69,75.31 119.65,73.27 119.65,66 R15.1 C13.2
Net*1_10: *1.10 C11.2 R14.2 | length 10.3
  Top Layer w0.5: R14.2 122.1,73.6 122.96,74.46 *1.10
Net*1_14: *1.14 C12.1 R16.3 | length 7.8
  Top Layer w0.5: *1.14 128.04,73.96 128.5,73.5 C12.1
Net*1_15: *1.15 C10.2 R13.2 | length 13.3
  Top Layer w0.5: R13.2@128.5,66 128.75,66.25 128.75,68.25 130.25,69.75 130.25,73.75 129.31,74.69 *1.15
Net*1_18: *1.18 J1.4 | length 49.3
  Top Layer w0.6: *1.18 134.875,79.9 136.75,78.025 139.05,78.025 v1(139.05,77.675)
  Bottom Layer w0.6: J1.4 128.67,107.205 139.05,96.825 v1(139.05,77.675)
Net*1_21: *1.21 C8.2 R11.2 | length 10.8
  Top Layer w0.5: *1.21 137.79,83.71 139.35,82.15 C8.2 R11.2
Net*1_28: *1.28 J1.3 | length 29.6
  Top Layer w0.6: *1.28 134.825,92.6 136.3,94.075 v1(136.3,96.8)
  Bottom Layer w0.6: J1.3 125.9,107.2 v1(136.3,96.8)
Net*1_32: *1.32 C14.2 | length 8.8
  Top Layer w0.5: *1.32 128.04,99.09 129.6,100.65 C14.2
Net*1_36: *1.36 C7.1 | length 32.3
  Top Layer w0.5: C7.1 109.75,97.5 117.25,105 122,105 122.96,104.04 *1.36
Net*1_37: *1.37 C15.2 | length 8.2
  Top Layer w0.5: C15.2 121.69,102.41 *1.37
Net*1_38: *1.38 C15.1 | length 8.8
  Top Layer w0.5: C15.1 118.9,98.1 120.42,96.58 *1.38
Net*1_40: *1.40 J1.2 | length 29.7
  Top Layer w0.6: v1(113.75,96.275) 113.75,94.925 116.075,92.6 *1.40
  Bottom Layer w0.6: v1(113.75,96.275) 123.13,105.655 J1.2
Net*2_1: *2.1 R20.2 U1.63 | length 51.3
  Top Layer w0.254: R20.2 112.75,42.655 *2.1 114.194,41.211 115.686,39.719 121.844,39.719 125.294,43.169 149.056,43.169 150.25,44.363 U1.63
Net*2_2: *2.2 R19.2 U1.62 | length 49.8
  Top Layer w0.254: R19.2 115.5,46.75 114.575,45.825 *2.2 114.575,41.369 115.844,40.1 121.686,40.1 125.136,43.55 148.898,43.55 149.75,44.402 U1.62
Net*2_3: *2.3 C18.2 L1.2 R19.1 R20.1 | length 23
  Top Layer w0.254: L1.2 R20.1 R19.1 ; C18.2 R19.1 ; *2.3 115.845,45.82 117.3,47.275 117.3,53.25 116.3,54.25 R19.1
Net*2_6: *2.6 C17.2 R17.1 R18.1 | length 17.4
  Top Layer w0.254: *2.6 117.975,46.32 117.975,53.225 119,54.25 R17.1 ; C17.2 R17.1 ; R18.1 R17.1
Net*2_7: *2.7 R17.2 U1.58 | length 43.5
  Top Layer w0.254: R17.2 120.925,51.075 *2.7 122.214,42.1 124.408,44.294 139.256,44.294 146.508,44.294 148.039,45.825 148.358,46.144 149.096,46.882 149.096,47.675 148.521,48.25 U1.58
Net*2_8: *2.8 R18.2 U1.59 | length 37
  Top Layer w0.254: *2.8 122.195,51.945 R18.2 ; *2.8@122.23,44.675 124.25,44.675 139.098,44.675 146.35,44.675 148.2,46.525 148.715,47.04 148.715,47.517 148.482,47.75 U1.59
Net*2_9: *2.9 R10.2 | length 25.5
  Top Layer w0.254: *2.9 117.023,30.848 119.925,33.75 R10.2
Net*2_12: *2.12 R9.2 | length 12
  Top Layer w0.254: *2.12 124.946,31.5 R9.2
Net*3_3: *3.3 C26.2 R24.2 | length 11.6
  Top Layer w0.5: R24.2 C26.2 74,82.15 75.56,83.71 *3.3
Net*3_6: *3.6 J2.1 | length 50.9
  Top Layer w0.6: v1(73.575,76.75) 76.25,76.75 79.4,79.9 *3.6
  Bottom Layer w0.6: v1(73.575,76.75) 73.575,83.05 73.525,83.1 73.525,95.775 82.96,105.21 J2.1
Net*3_9: *3.9 C30.2 R28.1 R30.2 | length 17.7
  Top Layer w0.5: *3.9 84.19,74.44 82.15,72.4 R30.2 R28.1 C30.2
Net*3_10: *3.10 C28.2 R26.2 | length 10.3
  Top Layer w0.5: R26.2 84.6,73.1 85.46,73.96 *3.10
Net*3_14: *3.14 C29.1 R27.3 | length 7.8
  Top Layer w0.5: *3.14 90.54,73.96 91,73.5 C29.1
Net*3_15: *3.15 C27.2 R25.2 | length 13.7
  Top Layer w0.5: R25.2 91.15,68.1 C27.2 92,68.25 92.5,68.75 92.5,74.25 91.81,74.94 *3.15
Net*3_18: *3.18 J2.4 | length 50.3
  Top Layer w0.6: *3.18 97.275,79.9 100.2,76.975 v1(101.7,76.975)
  Bottom Layer w0.6: J2.4 91.27,103.605 101.7,93.175 v1(101.7,76.975)
Net*3_21: *3.21 C25.2 R23.2 | length 10.8
  Top Layer w0.5: *3.21 100.165,83.71 101.725,82.15 C25.2 R23.2
Net*3_28: *3.28 J2.3 | length 31.6
  Top Layer w0.6: *3.28 v1(99.575,92.6)
  Bottom Layer w0.6: J2.3 88.5,103.675 v1(99.575,92.6)
Net*3_32: *3.32 C31.2 | length 8.8
  Top Layer w0.5: *3.32 90.54,98.49 92.1,100.05 C31.2
Net*3_36: *3.36 C19.1 | length 32.3
  Top Layer w0.5: C19.1 72.25,97.5 79.75,105 84.5,105 85.46,104.04 *3.36
Net*3_37: *3.37 C32.2 | length 8.2
  Top Layer w0.5: C32.2 84.19,102.46 *3.37
Net*3_38: *3.38 C32.1 | length 8.8
  Top Layer w0.5: C32.1 81.45,98.8 82.92,97.33 *3.38
Net*3_40: *3.40 J2.2 | length 29.7
  Top Layer w0.6: v1(76.35,96.2) 76.35,94.65 78.4,92.6 *3.40
  Bottom Layer w0.6: v1(76.35,96.2) 85.73,105.58 J2.2
Net*4_3: *4.3 C35.2 R32.2 | length 10.8
  Top Layer w0.5: R32.2 C35.2 36.925,82.15 38.485,83.71 *4.3
Net*4_6: *4.6 J4.1 | length 51.6
  Top Layer w0.6: v1(37.575,75.6) 37.575,77.075 40.4,79.9 *4.6
  Bottom Layer w0.6: v1(37.575,75.6) 37.05,76.125 37.05,96.178 45.36,104.488 J4.1
Net*4_9: *4.9 C38.2 R35.1 R37.2 | length 17.3
  Top Layer w0.5: *4.9 46.69,74.44 44.9,72.65 R37.2 C38.2 R35.1
Net*4_10: *4.10 C37.2 R34.2 | length 10.3
  Top Layer w0.5: R34.2 47.25,68.4 C37.2 47.25,72.5 47.96,73.21 *4.10
Net*4_14: *4.14 C41.1 R36.3 | length 7.8
  Top Layer w0.5: *4.14 53.04,72.96 53.5,72.5 C41.1
Net*4_15: *4.15 C36.2 R33.2 | length 16.1
  Top Layer w0.5: *4.15 54.31,73.44 55.25,72.5 55.25,68.5 55,68.25 C36.2 ; C36.2 53.5,66.15 C36.2
Net*4_18: *4.18 J4.4 | length 50.8
  Top Layer w0.6: *4.18 58.9,79.9 62,76.8 63.75,76.8 63.75,76.4 v1(63.75,76.775)
  Bottom Layer w0.6: J4.4 53.67,105.733 63.8,95.603 63.8,76.825 v1(63.75,76.775)
Net*4_21: *4.21 C34.2 R31.2 | length 10.8
  Top Layer w0.5: *4.21 62.765,83.71 64.325,82.15 C34.2 R31.2
Net*4_28: *4.28 J4.3 | length 31.7
  Top Layer w0.6: *4.28 v1(62.15,92.6)
  Bottom Layer w0.6: J4.3 50.9,107.475 62.15,96.225 v1(62.15,92.6)
Net*4_32: *4.32 C39.2 | length 8.8
  Top Layer w0.5: *4.32 53.04,99.515 54.45,100.925 C39.2
Net*4_36: *4.36 C33.1 | length 31.7
  Top Layer w0.5: C33.1 35.5,97.5 43,105 47.25,105 47.96,104.29 *4.36
Net*4_37: *4.37 C40.2 | length 8.2
  Top Layer w0.5: *4.37@46.65,94.39 C40.2
Net*4_38: *4.38 C40.1 | length 8.9
  Top Layer w0.5: C40.1 43.95,99.8 45.42,98.33 *4.38
Net*4_40: *4.40 J4.2 | length 29.5
  Top Layer w0.6: v1(39.05,96.325) 39.05,94.725 41.175,92.6 *4.40
  Bottom Layer w0.6: v1(39.05,96.325) 39.025,96.325 38.95,96.4 38.95,97.05 48.13,106.23 J4.2
NetC2_2: C2.2 D1.1 R7.1 R8.2 | length 9.1
  Top Layer w0.254: C2.2 R8.2 R7.1 D1.1@150.575,79.25
NetC3_1: C3.1 U1.36 Y1.1 | length 20.4
  Top Layer w0.254: U1.36 151.25,64.975 149.85,66.375 149.85,71.6 Y1.1 C3.1
NetC4_2: C4.2 U1.35 Y1.2 | length 14.4
  Top Layer w0.254: U1.35 151.75,67.42 Y1.2 155.92,67.92 C4.2
NetC5_1: C5.1 U1.50 Y2.1 | length 16.8
  Top Layer w0.254: C5.1@131.75,49.7 137.275,49.7 139.825,52.25 U1.50
NetC6_2: C6.2 U1.49 Y2.2 | length 17.2
  Top Layer w0.254: C6.2@131.75,55.5 131.75,54.825 137.755,54.825 139.83,52.75 U1.49
NetC16_1: C16.1 U1.12 | length 4
  Top Layer w0.254: v1(158.25,52.75) U1.12
  Bottom Layer w1: v1(158.25,52.75) 158.275,52.75 158.25,52.725 C16.1
NetD2_1: D2.1 R38.2 | length 7.8
  Top Layer w0.254: R38.2 D2.1@145.675,122.505
NetD3_1: D3.1 R39.2 | length 8.9
  Top Layer w0.254: R39.2 148.175,115.925 150.555,118.305 D3.1
NetD4_1: D4.1 R40.2 | length 9.9
  Top Layer w0.254: R40.2 150.675,116.05 155.555,120.93 D4.1
NetD5_1: D5.1 R41.2 | length 12.5
  Top Layer w0.254: R41.2 153.175,115.95 155.975,118.75 158.6,118.75 160.555,120.705 D5.1
NetD6_1: D6.1 R42.2 | length 15.3
  Top Layer w0.254: R42.2 155.675,115.95 157,117.275 162.65,117.275 165.555,120.18 D6.1
NetJ1_6: J1.6 R5.1 | length 58.5
  Top Layer w0.254: J1.6 121.745,120.42 124.606,123.281 141.514,123.281 142.576,122.219 142.576,101.619 145.084,99.111 153.034,99.111 153.75,98.395 R5.1
NetJ1_8: J1.8 R6.1 | length 50.8
  Top Layer w0.254: J1.8 127.285,120.535 129.65,122.9 141.356,122.9 142.195,122.061 142.195,101.461 144.926,98.73 151.445,98.73 151.75,98.425 R6.1
NetJ2_6: J2.6 R4.1 | length 101.3
  Top Layer w0.254: J2.6 84.345,120.97 87.418,124.043 141.829,124.043 143.338,122.535 143.338,101.935 145.399,99.873 156.877,99.873 157.725,99.025 157.75,99.025 R4.1
NetJ2_8: J2.8 R3.1 | length 93.3
  Top Layer w0.254: J2.8 89.885,121.322 92.225,123.662 141.672,123.662 142.957,122.377 142.957,101.777 145.242,99.492 154.733,99.492 155.75,98.475 R3.1
NetJ4_6: J4.6 R2.1 | length 143.4
  Top Layer w0.254: J4.6 46.745,121.595 49.955,124.805 142.145,124.805 144.1,122.85 144.1,102.25 145.715,100.635 159.29,100.635 161.75,98.175 R2.1
NetJ4_8: J4.8 R1.1 | length 136.1
  Top Layer w0.254: J4.8 52.285,122.234 54.475,124.424 141.987,124.424 143.719,122.693 143.719,102.093 145.557,100.254 158.071,100.254 159.75,98.575 R1.1
NetP1_1: P1.1 R8.1 U1.9 | length 64.2
  Top Layer w0.254: R8.1 145.425,76.075 164.825,76.075 167.5,78.75 P1.1 ; U1.9 166.95,51.25 v1(167.575,51.875)
  Bottom Layer w0.254: v1(167.575,51.875) 167.566,51.866 167.201,51.866 165.807,53.261 165.807,64.552 166.95,65.695 166.95,75.7 P1.1
NetP1_4: P1.4 U1.47 | length 73
  Top Layer w0.254: v1(142.4,53.75) U1.47
  Bottom Layer w0.254: v1@142.375,53.75 142.375,54.911 144.049,56.585 144.049,63.781 146.604,66.336 146.604,77.34 146.604,90.64 151.583,95.619 160.751,95.619 P1.4
NetP1_5: P1.5 U1.52 | length 76.9
  Top Layer w0.254: v1(141.075,51.25) U1.52
  Bottom Layer w0.254: v1(141.075,51.25) 141.425,51.6 141.425,54.5 143.668,56.743 143.668,63.939 146.223,66.494 146.223,77.498 146.223,90.798 147.897,92.472 151.425,96 160.909,96 167.999,88.91 P1.5
NetP2_2: P2.2 U1.44 | length 105.7
  Top Layer w0.254: v1(141.1,58.45) 141.1,57.625 143.475,55.25 U1.44
  Bottom Layer w0.254: v1(141.1,58.45) 142.344,59.694 142.344,64.231 145.08,66.968 145.08,91.272 150.958,97.149 153.446,97.149 153.453,97.143 154.629,97.143 155.941,97.143 167.186,97.143 167.192,97.149 168.559,97.149 172.593,93.116 172.593,65.383 P2.2
NetP2_3: P2.3 U1.45 | length 106.5
  Top Layer w0.254: v1(139.543,58.643) 143.436,54.75 U1.45
  Bottom Layer w0.254: v1(139.543,58.643) 140.711,57.475 141.625,57.475 142.725,58.575 142.725,64.074 145.461,66.81 145.461,91.114 151.109,96.762 167.35,96.762 ; 167.35,96.768 168.401,96.768 172.212,92.958 172.212,67.542 P2.3
NetP2_4: P2.4 U1.46 | length 103
  Top Layer w0.254: v1(139.325,56.875) 140.772,56.875 143.397,54.25 U1.46
  Bottom Layer w0.254: v1(139.325,56.875) 142,56.875 143.175,58.05 143.175,63.985 145.842,66.652 145.842,90.956 151.267,96.381 168.25,96.381 171.831,92.8 171.831,69.701 P2.4
NetP2_5: P2.5 U1.13 | length 26.1
  Top Layer w0.254: U1.13 166.719,53.25 166.783,53.314 166.783,53.542 v1(166.7,53.625)
  Bottom Layer w0.254: v1(166.7,53.625) 166.188,54.137 166.188,55.837 166.188,64.394 167.35,65.556 167.45,65.656 167.45,69.35 168.51,70.41 P2.5
NetR9_1: R9.1 U1.30 | length 79
  Top Layer w0.254: R9.1 139.3,31.5 141.019,33.219 157.894,33.219 172.606,47.931 172.606,56.583 170.183,59.006 167.594,59.006 166.466,60.134 166.466,62.784 163.844,65.406 157.253,65.406 154.25,62.403 U1.30
NetR10_1: R10.1 U1.29 | length 76.4
  Top Layer w0.254: R10.1 137.9,33.6 157.736,33.6 172.225,48.089 172.225,56.425 170.025,58.625 167.436,58.625 166.085,59.976 166.085,62.626 163.686,65.025 157.411,65.025 154.75,62.364 U1.29
NetR21_2: R21.2 U1.65 | length 8.3
  Top Layer w0.254: R21.2@151.225,38.175 150.975,38.425 149.848,39.552 149.848,41.975 151.15,43.277 151.225,43.352 U1.65@151.225,45.375
NetR38_1: R38.1 U1.68 | length 114
  Top Layer w0.254: v1(145.675,110.45) R38.1 ; v1(152.138,43.363) 152.75,43.975 U1.68
  Bottom Layer w0.254: v1(145.675,110.45) 147.125,111.9 148.775,111.9 149.475,111.2 149.475,103.375 150.769,102.081 154.945,97.905 166.87,97.905 166.877,97.911 168.875,97.911 173.355,93.431 173.355,59.978 171.608,58.231 168.267,58.231 167.594,57.558 167.594,55.77 169.331,54.033 169.331,49.254 167.108,47.031 162.306,47.031 158.638,43.363 154.57,43.363 154.493,43.439 152.214,43.439 v1(152.138,43.363)
NetR39_1: R39.1 U1.69 | length 115
  Top Layer w0.254: v1(148.175,110.375) R39.1 ; v1(151.125,41.925) 152.375,41.925 153.236,42.786 153.236,45.436 U1.69
  Bottom Layer w0.254: v1@148.025,110.375 148.2,110.2 148.2,102.934 149.434,101.7 153.61,97.524 156.098,97.524 167.028,97.524 167.034,97.53 168.717,97.53 172.974,93.273 172.974,60.136 171.45,58.612 168.109,58.612 167.213,57.716 167.213,55.612 168.95,53.875 168.95,49.412 166.95,47.412 162.148,47.412 158.48,43.744 154.728,43.744 154.22,44.252 151.769,44.252 151.249,43.731 151.249,42.049 v1(151.125,41.925)
NetR40_1: R40.1 U1.72 | length 107.1
  Top Layer w0.254: v1(150.675,110.375) R40.1 ; v1(154.125,42.55) 154.75,43.175 U1.72
  Bottom Layer w0.254: v1(150.675,110.375) 150.675,104.025 156.414,98.286 166.712,98.286 166.719,98.292 169.033,98.292 173.736,93.589 173.736,59.82 171.766,57.85 168.425,57.85 167.975,57.4 167.975,55.928 169.712,54.191 169.712,49.096 167.266,46.65 162.464,46.65 158.795,42.982 154.557,42.982 v1(154.125,42.55)
NetR41_1: R41.1 U1.38 | length 90.1
  Top Layer w0.254: U1.38 150.25,63.711 148.194,65.767 148.194,73.427 150.042,75.275 170.668,75.275 172.769,77.376 172.769,94.792 166.004,101.557 157.918,101.557 153.175,106.3 R41.1
NetR42_1: R42.1 U1.37 | length 88.1
  Top Layer w0.254: U1.37 150.75,63.75 148.575,65.925 148.575,73.269 150.2,74.894 170.826,74.894 173.15,77.218 173.15,94.95 166.162,101.938 160.037,101.938 155.675,106.3 R42.1
NULL_ALFA: R6.2 U1.28 | length 47.5
  Top Layer w0.254: v1(151.75,92.9) R6.2 ; U1.28 155.25,62.05 157,63.8 v1(162.2,63.8)
  Bottom Layer w0.254: v1(151.75,92.9) 151.75,92.82 155.369,89.201 162.994,81.576 162.994,64.594 v1(162.2,63.8)
NULL_DELTA: R3.2 U1.27 | length 46.5
  Top Layer w0.254: U1.27 155.75,61.1 156.8,62.15 160.6,62.15 162.95,62.15 v1(163.375,62.575) ; v1(155.75,92.975) R3.2
  Bottom Layer w0.254: v1(155.75,92.975) 155.75,89.359 158.988,86.121 160.607,84.502 163.375,81.734 v1(163.375,62.575)
NULL_FOCUS: R1.2 U1.34 | length 49
  Top Layer w0.254: U1.34 152.25,61.275 156.762,65.787 164.437,65.787 v1@165.513,66.863 ; v1(159.75,93.05) R1.2
  Bottom Layer w0.254: v1(159.75,93.05) 159.75,86.436 161.369,84.817 165.725,80.461 165.725,67 v1(165.625,67)
POS_ALFA: R5.2 U1.5 U1.41 | length 81.1
  Top Layer w0.254: v1@146,60.225 145.4,59.625 145.4,57.7 146.35,56.75 U1.41 ; v1(153.75,92.9) R5.2 ; U1.5 163.5,49.25 v1(164.175,48.575)
  Bottom Layer w0.254: v1(145.975,60.275) 145.975,62.6 148.15,64.775 150.35,64.775 151.014,64.111 160.164,64.111 163.564,60.711 163.564,59.482 163.55,59.468 163.55,49.2 v1(164.175,48.575) ; 148.2,64.775 148.2,67.175 148.194,67.169 148.194,68.994 148.194,72.419 150.2,74.425 150.2,93.35 151.475,94.625 153.2,94.625 153.75,94.075 v1(153.75,92.9)
POS_DELTA: R4.2 U1.6 | length 54.2
  Top Layer w0.254: v1(157.75,93) R4.2 ; U1.6 164.95,49.75 v1(165.55,49.15)
  Bottom Layer w0.254: v1(157.75,93) 157.75,87.897 160.988,84.659 164.45,81.197 164.45,55.275 164.45,50.475 v1@165.525,49.4
POSFOCUS: R2.2 U1.7 | length 56.7
  Top Layer w0.254: U1.7 166.125,50.25 v1(167.2,49.175) v1@167.525,49.5 ; v1(161.75,93.075) R2.2
  Bottom Layer w0.254: v1(161.75,93.075) 161.75,84.975 166.569,80.156 166.569,75.858 166.569,65.853 165.426,64.71 165.426,57.522 165.426,50.949 v1(167.2,49.175)
RESET: *1.27 *3.27 *4.27 U1.18 | length 244.4
  Top Layer w0.254: *4.27 61.495,91.33 v1@62.475,90.35 ; v1(86.625,55.35) 101.5,55.35 v1(103.3,57.15) v1@102.825,57.15 ; *3.27 98.995,91.33 v1(99.589,90.736) v1@99.825,90.5 ; v1(126.175,52.625) 126.175,55.775 129.15,58.75 v1(134.75,58.75) 137.289,58.75 138.654,60.115 143.865,60.115 144.112,60.362 146.05,62.3 v1(147.75,62.3) ; *1.27 v1(136.18,91.33) ; U1.18 161.575,55.75 162.675,56.85 v1(162.675,59.85)
  Bottom Layer w0.254: v1(62.475,90.275) 62.2,90 62.2,59.375 66.225,55.35 v1(86.625,55.35) 87.781,54.194 124.606,54.194 v1(126.175,52.625) ; v1(99.589,90.736) 100.85,89.475 100.85,77.382 100.811,77.343 100.811,76.607 100.85,76.568 100.85,59.125 102.825,57.15 v1(103.3,57.15) ; v1(134.75,58.75) 134.75,61.5 134.525,61.725 134.525,89.675 v1(136.18,91.33) ; v1(147.75,62.3) 155.425,62.3 157.875,59.85 v1(162.675,59.85)
SLEEP: *1.42 *3.42 *4.42 U1.23 | length 259.5
  Top Layer w0.254: v1(39.875,90.06) *4.42 ; v1(64.175,53.75) 64.175,54.15 64.625,53.7 66,53.7 v1(71.9,59.6) ; v1(77.185,90.06) *3.42 ; v1(114.91,90.06) *1.42 ; v1(124.675,49.35) 124.675,55.8 128.625,59.75 137.75,59.75 138.496,60.496 143.707,60.496 144.973,61.762 145.892,62.681 146.561,63.35 v1(148.875,63.35) ; U1.23 157.75,60.025 v1(158.775,61.05)
  Bottom Layer w0.254: v1(39.875,90.06) 41.875,88.06 41.875,63.775 52.825,52.825 63.25,52.825 v1(64.175,53.75) 65.3,52.625 120.7,52.625 123.975,49.35 v1(124.675,49.35) ; v1(71.9,59.6) 75.375,59.6 76.425,60.65 76.425,89.3 v1(77.185,90.06) ; v1(114.91,90.06) 116.425,88.545 116.425,60.5 118.275,58.65 v1(127.475,58.65) ; v1(148.875,63.35) 148.925,63.3 156.725,63.3 158.775,61.25 v1(158.775,61.05)
STEPALFA: *1.31 U1.43 | length 61.4
  Top Layer w0.254: *1.31 129.31,96.885 v1(129.7,97.275) ; v1@133.5,57.25 136.5,57.25 138.984,59.734 141.916,59.734 145.9,55.75 U1.43
  Bottom Layer w0.254: v1(129.7,97.275) 133.6,93.375 v1(133.6,57.25)
STEPDELTA: *3.31 U1.73 | length 117.5
  Top Layer w0.254: v1(91.75,96.95) 91.81,96.89 *3.31 ; U1.73 155.25,39.325 v1(155.35,39.225)
  Bottom Layer w0.254: v1(91.75,96.95) 98.059,90.641 98.059,88.799 100.45,86.408 100.45,80.5 100.43,80.48 100.43,76.429 100.45,76.409 100.45,59.782 100.45,57.8 102.007,56.243 126.508,56.243 137.751,45 137.751,41.754 141.93,37.575 151.705,37.575 153.013,38.883 153.355,39.225 v1(155.35,39.225)
STEPFOCUS: *4.31 U1.56 | length 138.3
  Top Layer w0.254: v1(129,46.4) 130.125,45.275 138.6,45.275 140.763,47.438 140.891,47.438 142.703,49.25 U1.56
  Top Layer w0.6: *4.31 v1(54.31,97.51)
  Bottom Layer w0.254: v1(54.31,97.51) 59.3,92.52 59.3,80.479 59.3,60.603 66.852,53.051 122.349,53.051 v1(129,46.4)
VCC: *1.16 *3.16 *4.16 C20.1 C21.1 C22.1 C23.1 C24.1 D1.2 J1.7 J2.7 J4.7 L1.1 P1.2 P2.1 R7.2 R16.2 R22.1 R27.2 R30.1 R36.2 R37.1 U1.24 U1.25 U1.32 U1.48 U1.60 U1.61 U1.66 U1.71 U2.4 | length 593.6
  Top Layer w0.254: v1(43.1,54.6) R37.1 ; v1(144.675,47.925) 145.35,47.25 U1.60 ; U1.48 v1(149.875,53.25) ; U1.61 149.25,46.425 149.7,46.875 149.7,48.55 150.825,49.675 v1(151.725,49.675) ; U1.66 151.75,49.65 v1(151.725,49.675) ; U1.32 153.25,55.9 v1(153.617,55.533) 154.225,54.925 156.45,54.925 157.25,55.725 U1.24 U1.25 ; U1.71 154.25,48.85 153.425,49.675 v1(151.725,49.675)
  Top Layer w0.5: v1(32.675,54.6) v1(43.1,54.6) ; v1@80.35,63.825 R30.1 ; v1(93.08,76.045) *3.16 ; 103.15,50.5 L1.1 106.9,55.425 110.2,58.725 117.475,66 R22.1 ; *1.16 130.58,75.495 131.7,74.375 131.7,65.6 C23.1 129.6,62.4 131,61 143.25,61 146.45,64.2 v1@146.45,64.95 ; R7.2 D1.2@150.575,77.25 ; D1.2 164.1,77.3 168.09,81.29 P1.2 ; v1@161.35,73.325 167.425,67.25 167.425,61.25 168.425,60.25 P2.1
  Top Layer w0.6: v1@55.58,50.555 v1(55.58,53.73) ; v1(55.58,75.205) *4.16
  Top Layer w1: v1(80.75,58.325) 78.25,55.825 U2.4 79.4,50.5 C20.1 103.15,50.5 103.15,49.175 113.7,38.625 122.425,38.625 125.525,41.725 v1(144.575,41.725)
  Bottom Layer w0.254: v1(149.875,53.25) v1@150.125,53.5
  Bottom Layer w0.5: v1@43.038,54.537 47.075,50.5 v1(55.525,50.5) C20.1 ; v1(80.255,63.825) 80.255,58.82 v1(80.75,58.325) 91.75,58.325 93.08,59.655 v1(93.08,76.045) ; C24.1 147.6,52.95 144.775,55.775 144.775,58.394 144.775,63.25 v1(146.45,64.925) 147.55,66.025 147.55,69.15 147.55,75.8 v1(148.925,77.175) ; v1@161.325,73.475 v1(161.325,77.225)
  Bottom Layer w0.6: v1@32.625,54.475 32.625,117.7 37.225,122.3 49.515,122.3 ; J4.7 49.515,122.3 ; v1(55.58,53.73) v1(55.58,75.205) ; J2.7 87.115,122.215 ; J1.7 124.8,119.225 124.8,122.3 49.515,122.3
  Bottom Layer w1: v1(144.575,41.725) 144.675,41.825 v1(144.675,47.925) 147.625,47.925 ; 147.6,47.95 C24.1 ; C24.1@147.6,52.95 147.6,53.25 v1(149.875,53.25) 151.775,53.25 ; v1@151.775,49.675 151.775,50.502 ; v1@153.4,55.25 151.775,53.625 151.775,53.25 ; v1(153.617,55.533) C22.1@153.625,58.65 ; C21.1 155.348,50.502 151.775,50.502 ; 151.775,50.502 151.775,53.25
  other v1: 161.3,73.45
pads on no net: *1.7 *1.8 *1.17 *1.29 *1.30 *1.39 *2.4 *2.5 *2.15 *2.16 *3.7 *3.8 *3.17 *3.29 *3.30 *3.39 *4.7 *4.8 *4.17 *4.29 *4.30 *4.39 D1.3 J1.9 J2.9 J4.9 P1.6 U1.1 U1.2 U1.10 U1.14 U1.19 U1.20 U1.21 U1.22 U1.33 U1.39 U1.40 U1.42 U1.55 U1.74 U1.79 U1.80
copper on no net:
  other v1: 102.5,63 107.5,63 138.75,101.25 138.75,106.25

## Polygon pours and split planes (outlines as drawn)
GND on Bottom Layer "Bottom Layer-No Net" (solid, remove dead copper): 204.575,126.425 204.575,24.825 356.975,24.825 357,24.85 356.95,24.9 356.95,126.425
GND on Top Layer "Bottom Layer-No Net" (solid, remove dead copper): 27.175,250.325 27.175,148.725 179.575,148.725 179.6,148.75 179.55,148.8 179.55,250.325

## Silkscreen, mask and mechanical layers (free items; w line width, h text height)
Top Overlay:
  lines w0.254: 24.799,23.513 24.799,24.021 ; 24.868,125.476 25.375,127 ; 24.916,26.899 25.425,25.375 ; 25.121,127 25.629,127 ; 25.171,25.375 25.679,25.375 ; 25.395,86.116 25.375,127 ; 25.405,66.259 25.425,25.375 ; 25.884,125.476 25.375,127 ; 25.932,26.899 25.425,25.375 ; 26.323,23.259 24.799,23.767 ; 26.323,24.275 24.799,23.767 ; 92.328,23.767 24.799,23.767 ; 109.645,23.767 177.174,23.767 ; 175.65,23.259 177.174,23.767 ; 175.65,24.275 177.174,23.767 ; 177.174,23.513 177.174,24.021
  text "101.62501 (mm)" at 24.481,85.861 h1.52 r270.03
  text "152.375 (mm)" at 92.582,22.853 h1.52

## Text inside footprints (layer, text, board x,y; h text height)
C1: Top Overlay "+" at 58.487,47.132 h1.5 r90
C20: Top Overlay "+" at 98,52.55 h1.5 r270
C42: Top Overlay "+" at 84.45,47 h1.5
J1: Top Overlay "6" at 121.245,122.045 h1.5; Top Overlay "9" at 129.555,122.045 h1.5; Top Overlay "5" at 130.94,112.645 h1.5; Top Overlay "1" at 120.11,112.645 h1.5
J2: Top Overlay "6" at 83.845,122.045 h1.5; Top Overlay "9" at 92.155,122.045 h1.5; Top Overlay "5" at 93.54,112.645 h1.5; Top Overlay "1" at 82.71,112.645 h1.5
J4: Top Overlay "6" at 46.245,122.045 h1.5; Top Overlay "9" at 54.555,122.045 h1.5; Top Overlay "5" at 55.94,112.645 h1.5; Top Overlay "1" at 45.11,112.645 h1.5
JP: Mechanical 1 "Mech 2 - Clearance, move to internal plane if present" at 93.684,25.536 h0.3 r90; Mechanical 1 "Mech 1 - Slot cut-out" at 93.184,25.536 h0.3 r90; Mechanical 1 "Assign keep-out area to slot" at 92.184,25.536 h0.3 r90; Mechanical 1 "Alert PCB fab to slot details" at 92.684,25.536 h0.3 r90
U3: Top Overlay "2" at 78,38.575 h1.5 r180; Top Overlay "1" at 80.29,38.575 h1.5 r180; Top Overlay "3" at 75.46,38.575 h1.5 r180